# Altium PCB PCB_01.PcbDoc
Units mm, origin at the board's own origin, x right, y up, seen from the top; angles counter-clockwise.
Board outline 100 x 100 mm, 4 copper layers (Top Layer, Int1 (GND), Int2 (PWR), Bottom Layer), stack 1.369 mm thick; 74 components, 60 nets, 282 pads, 67 vias.
Unrouted connection lines stored in the file: 96.
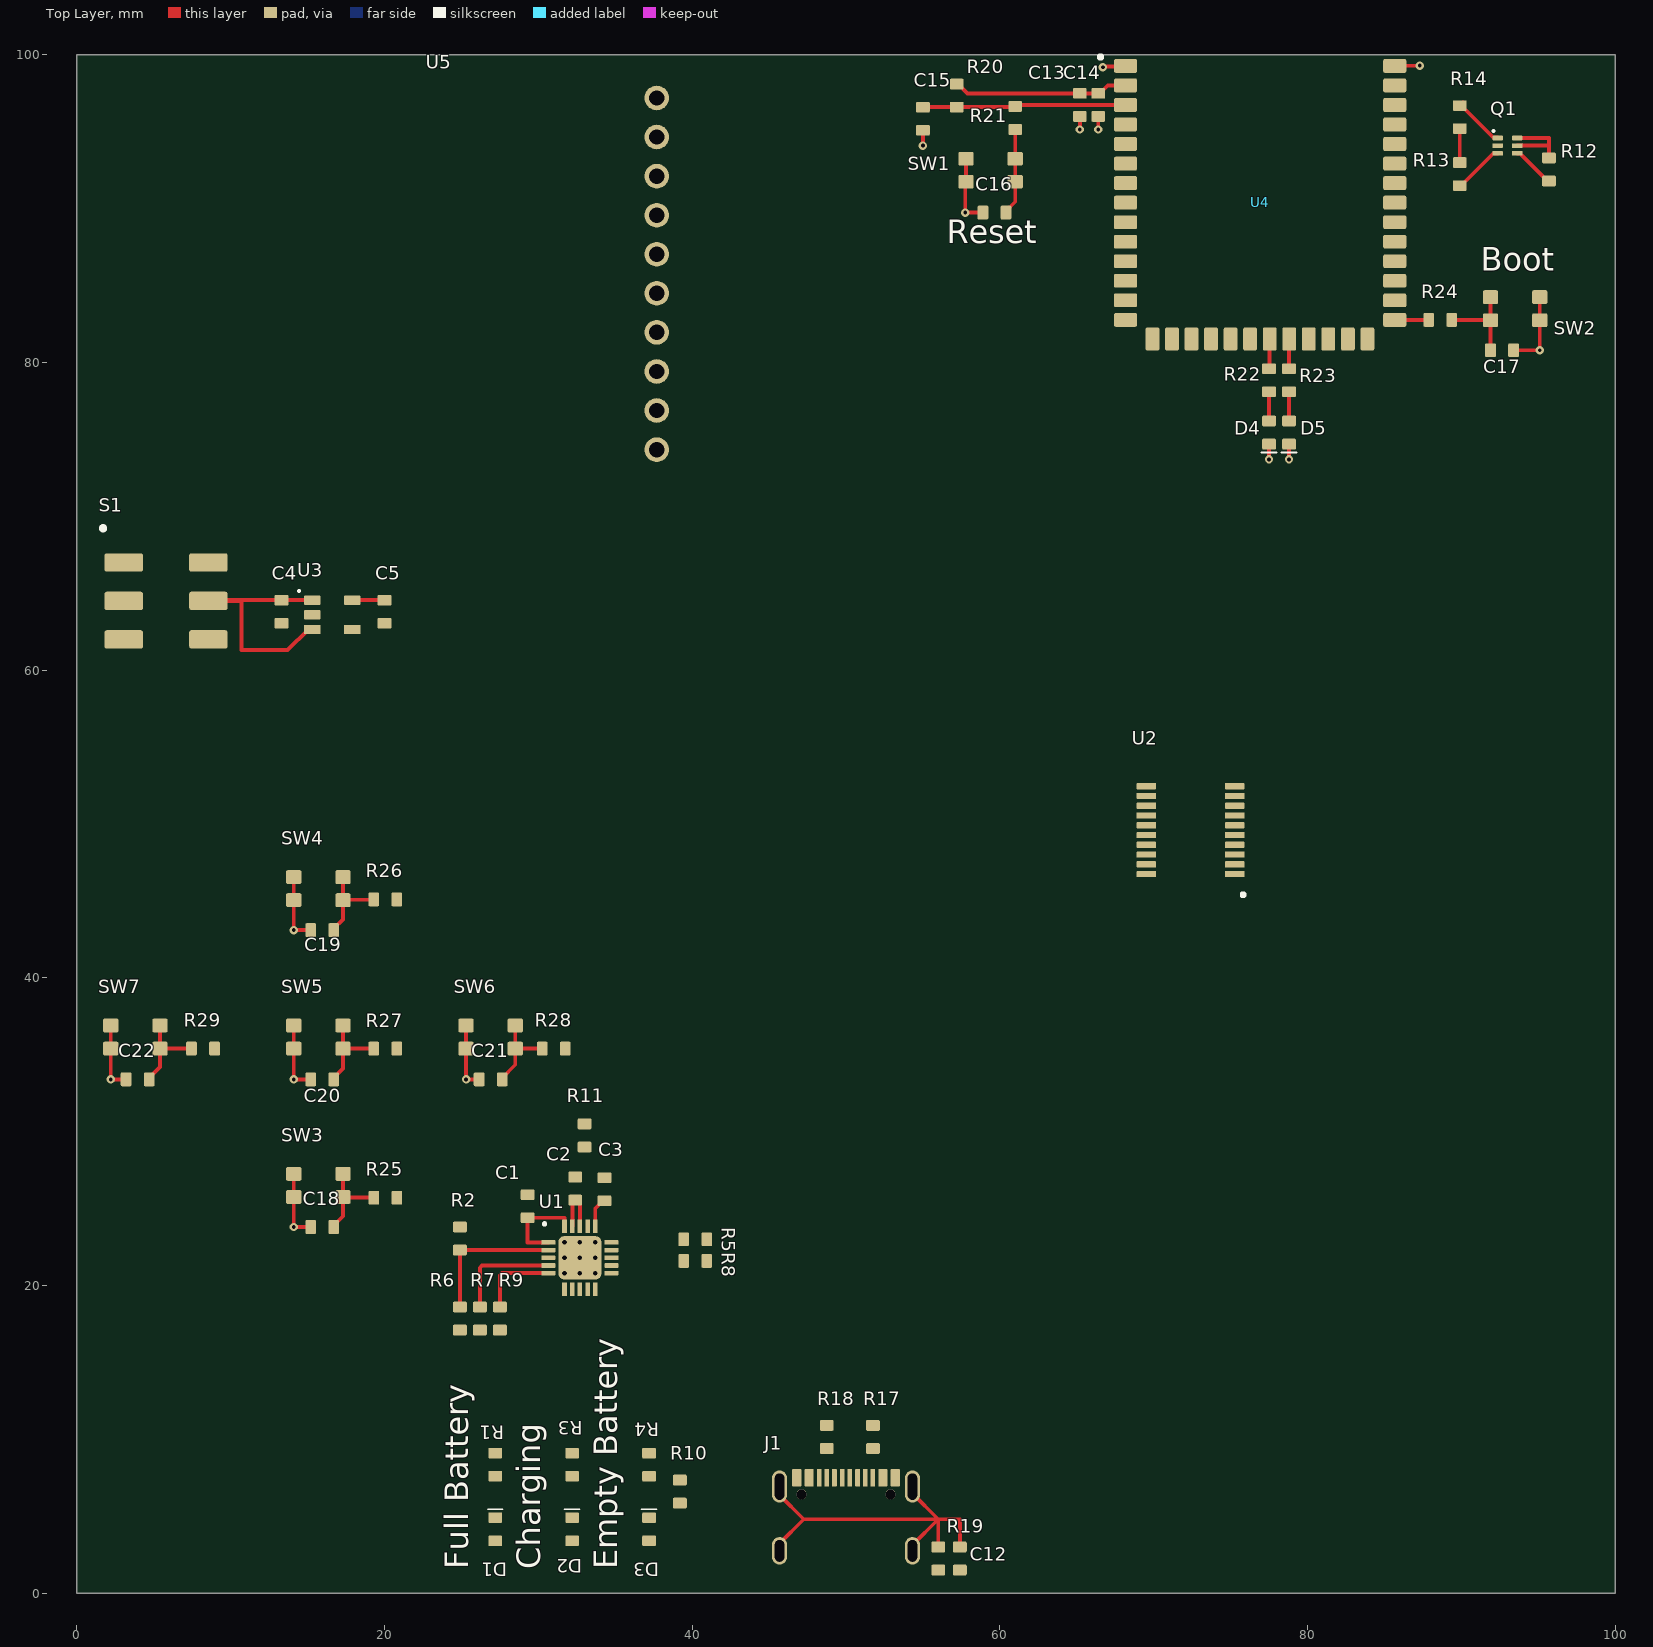
[diagram p0: Top Layer view]
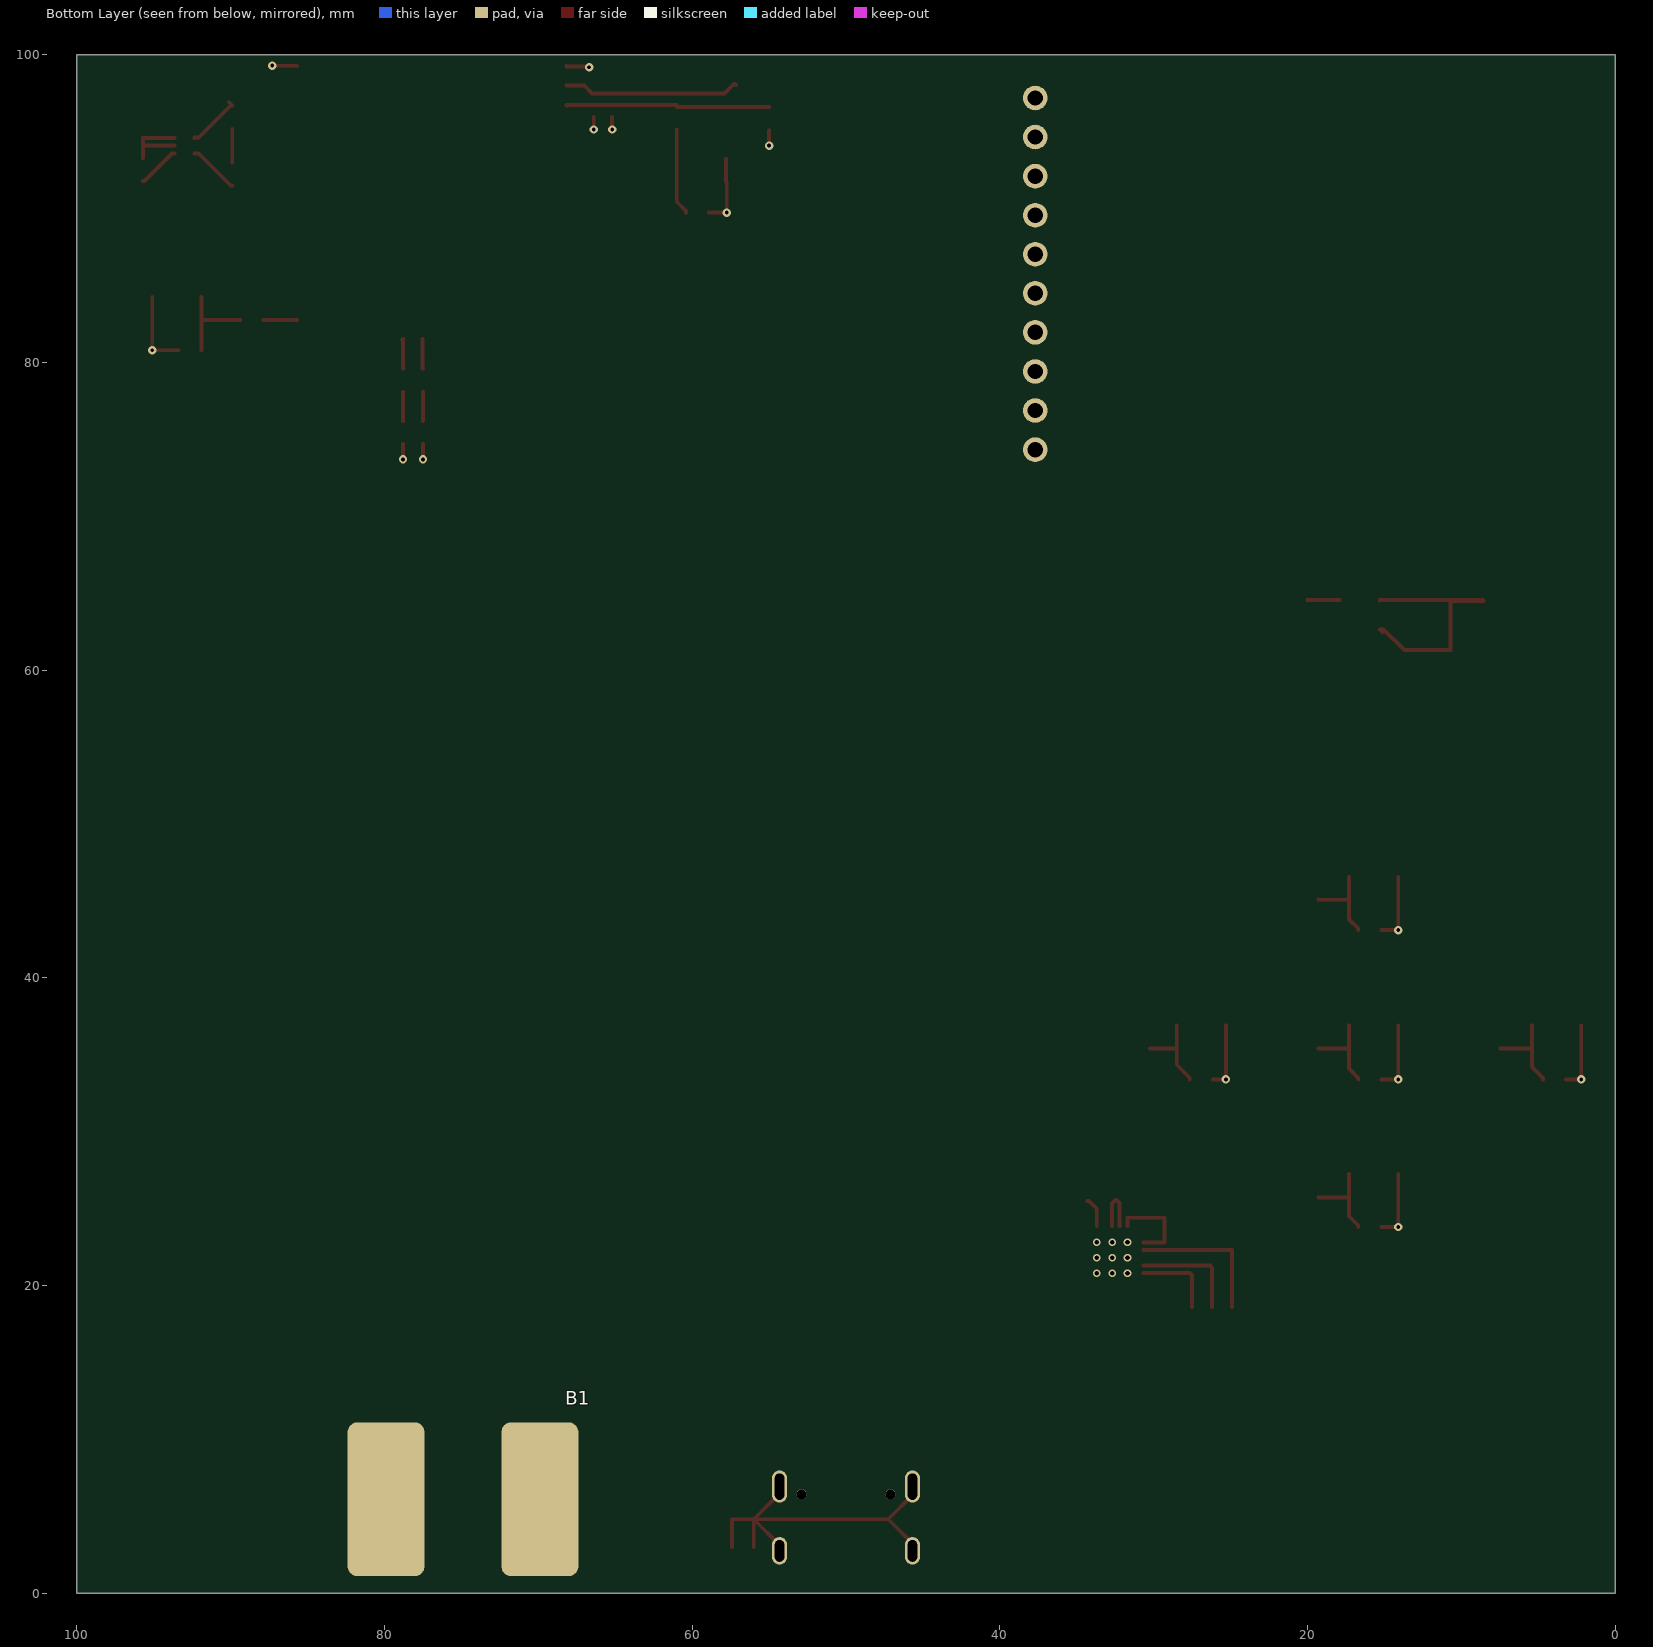
[diagram p1: Bottom Layer view, seen from below]
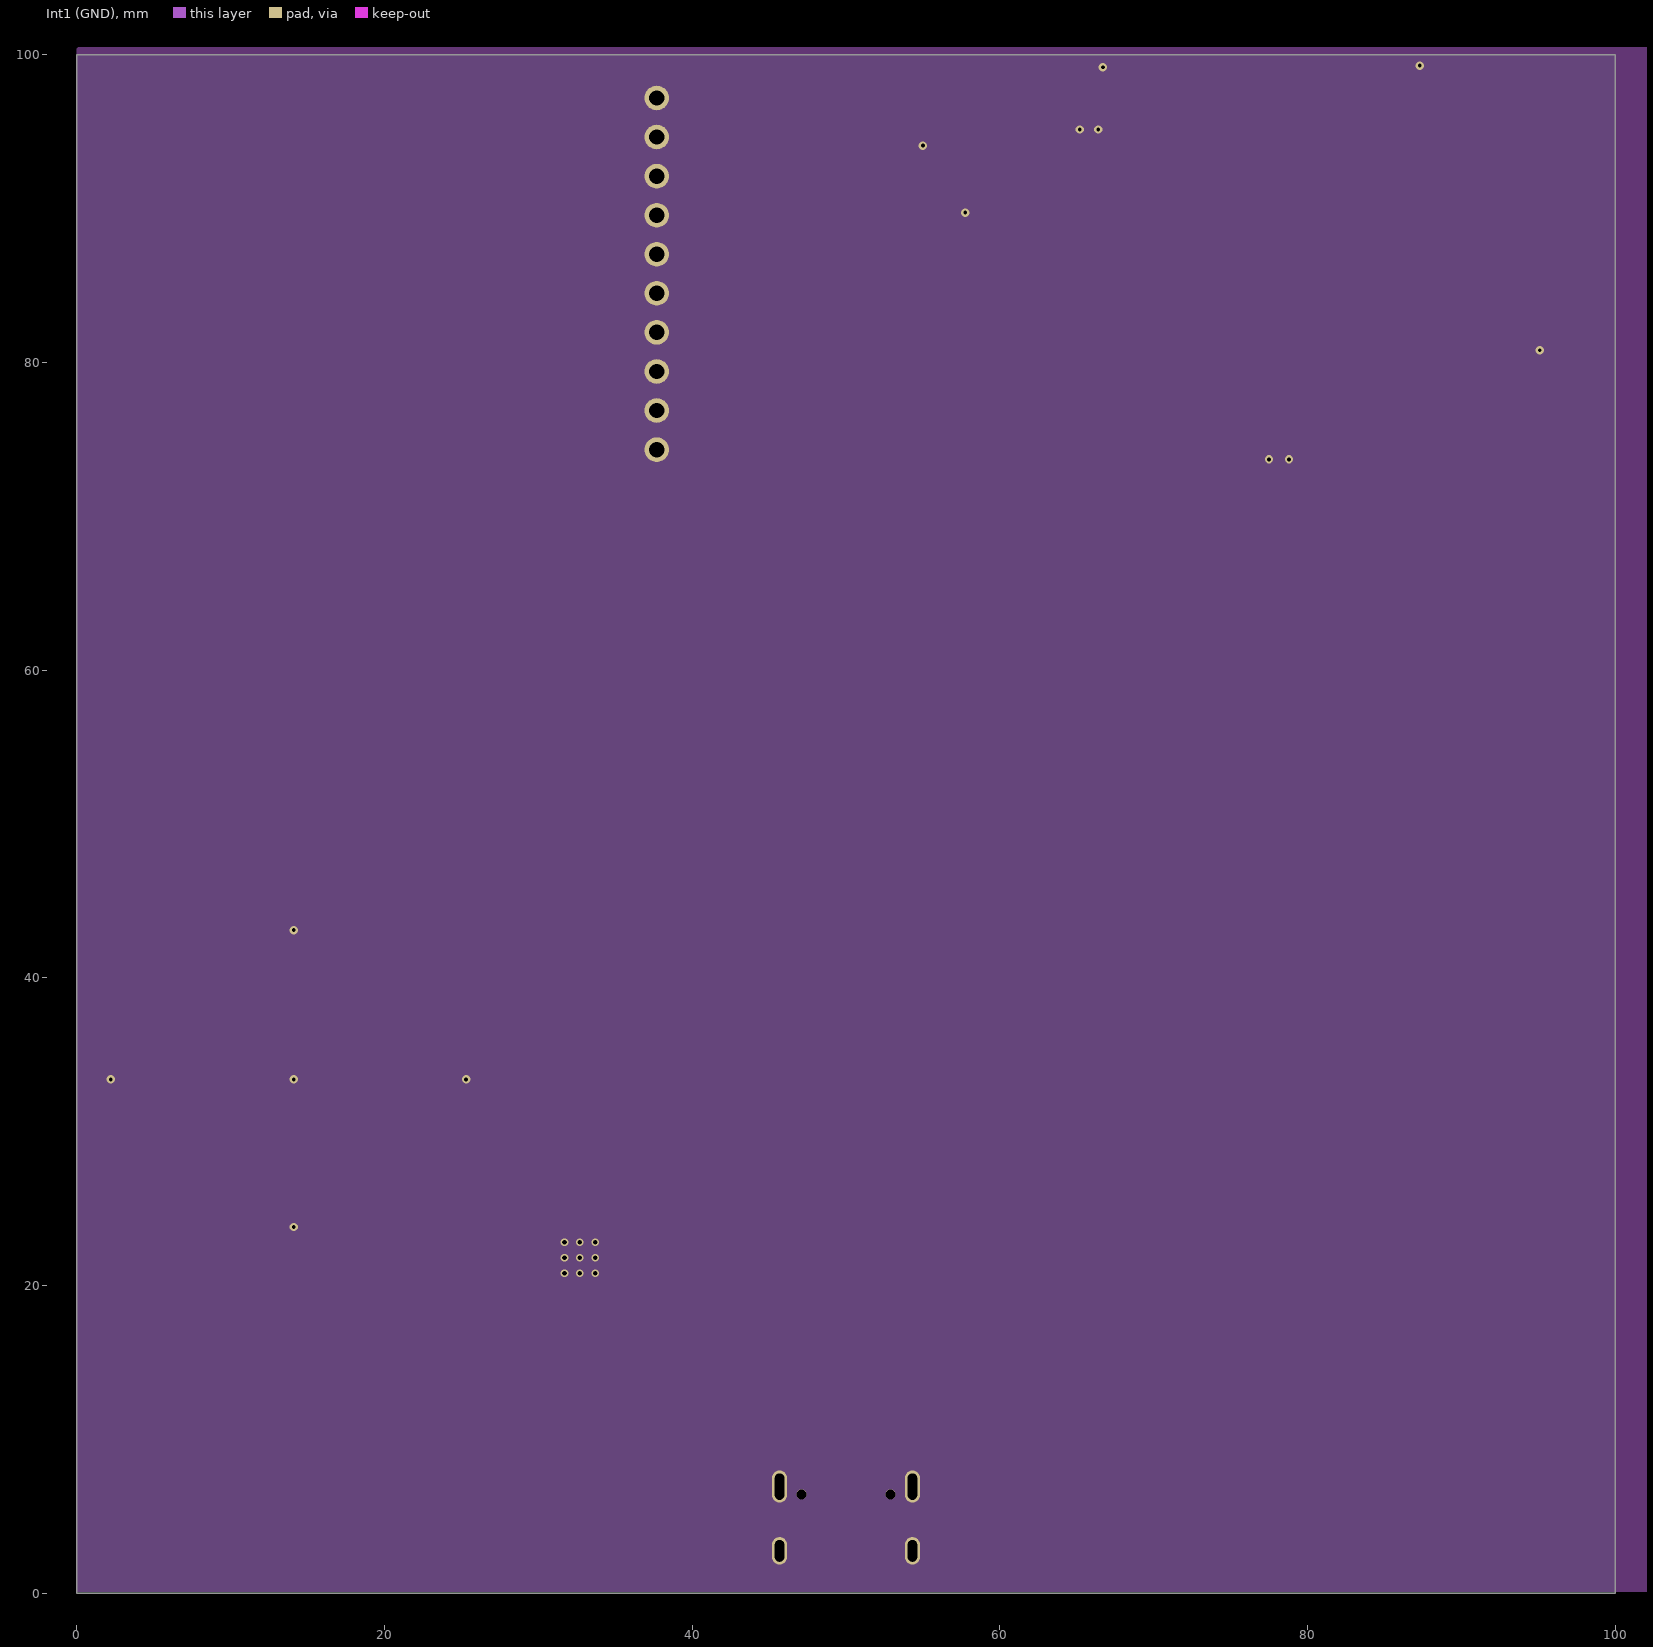
[diagram p2: Int1 (GND)]

## Layer stack, top to bottom
Top Solder: solder mask 0.0254, SM-001, Dk 4
Top Layer: signal copper 0.035
Dielectric 1: prepreg 0.1295, PP-017, Dk 4.3
Dielectric 2: prepreg 0.1295, PP-017, Dk 4.3
Int1 (GND): signal copper 0.035
Dielectric 3: core 0.7112, Core-039, Dk 4.8
Int2 (PWR): signal copper 0.035
Dielectric 4: prepreg 0.1295, PP-017, Dk 4.3
Dielectric 5: prepreg 0.1295, PP-017, Dk 4.3
Bottom Layer: signal copper 0.035
Bottom Solder: solder mask 0.0254, SM-001, Dk 4

## Board outline
0,0 0,100 100,100 100,0

## Design rules (kind name [scope] priority, off if disabled: settings)
Clearance Clearance_1 [All] p1: gap=0.2 ignorepadtopadclearanceinfootprint=TRUE
PolygonConnect [All] p1: connectstyle=Relief reliefconductorwidth=0.254 reliefentries=4 polygonreliefangle="90 Angle" airgapwidth=0.254
RoutingVias [All] p1: holewidth=0.25 width=0.55 viastyle="Through Hole" minholewidth=0.25 minwidth=0.55 maxholewidth=0.25 maxwidth=0.55
SolderMaskExpansion [All] p1: expansion=0.102 istentingtop=FALSE
Width [All] p1: maxlimit=0.3 minlimit=0.25 preferedwidth=0.25
30 further rules are at their usual default settings.

## Classes and differential pairs
component class Designator: Boot

## Components (designator, comment, footprint, x,y, rotation, side; value= is the part's Value field where it differs from the comment)
B1 "1200mAh" battery 74.9,6.1 r0 bottom
C1 "4.7 μF" "Capacitor 0603" 29.3,25.15 r270 top
C2 "10 μF" "Capacitor 0603" 32.4,26.3 r270 top
C3 "4.7 μF" "Capacitor 0603" 34.3,26.25 r90 top
C4 "4.7 μF" "Capacitor 0603" 13.3,63.8 r90 top
C5 "4.7 μF" "Capacitor 0603" 20,63.8 r270 top
C6 "0.1 μF" "Capacitor 0603" 201.381,61.155 r0 top
C7 "4.7 μF" "Capacitor 0603" 205.191,61.155 r0 top
C8 "10 nF" "Capacitor 0603" 118.45,61.155 r0 top
C9 "47 pF" "Capacitor 0603" 142.006,48.442 r0 top
C10 "47 pF" "Capacitor 0603" 145.816,48.442 r0 top
C11 "0.1 μF" "Capacitor 0603" 123.083,48.442 r0 top
C12 "4.7 μF" "Capacitor 0603" 57.4,2.25 r90 top
C13 "22 μF" "Capacitor 0603" 65.2,96.75 r90 top
C14 "0.1 μF" "Capacitor 0603" 66.4,96.75 r90 top
C15 "1 μF" "Capacitor 0603" 55,95.85 r90 top
C16 "0.1 μF" "Capacitor 0603" 59.65,89.75 r0 top
C17 "0.1 μF" "Capacitor 0603" 92.65,80.8 r0 top
C18 "0.1 μF" "Capacitor 0603" 15.95,23.8 r0 top
C19 "0.1 μF" "Capacitor 0603" 15.95,43.1 r0 top
C20 "0.1 μF" "Capacitor 0603" 15.95,33.4 r0 top
C21 "0.1 μF" "Capacitor 0603" 26.9,33.4 r0 top
C22 "0.1 μF" "Capacitor 0603" 3.95,33.4 r0 top
D1 "Green" "LED 0603" 27.2,4.15 r90 top
D2 "Blue" "LED 0603" 32.2,4.15 r90 top
D3 "Red" "LED 0603" 37.2,4.15 r90 top
D4 "Green" "LED 0603" 77.5,75.45 r270 top
D5 "Blue" "LED 0603" 78.8,75.45 r270 top
DS1 "FT231XS-R" ? 160.9,132.1 r180 top
FB2 "0.6kΩ" "Ferrite Bead 0603" 145.12,61.155 r0 top
J1 "USB4105-GF-A" USB4105-GF-A 50,7.5 r0 top
Q1 "DMC2400UV-7" "MOSFET N/P-CH" 93,94.1 r270 top
R1 "0.47kΩ" "Resistor 0603" 27.2,8.35 r90 top
R2 "330kΩ" "Resistor 0603" 24.9,23.05 r90 top
R3 "0.47kΩ" "Resistor 0603" 32.2,8.35 r90 top
R4 "0.47kΩ" "Resistor 0603" 37.2,8.35 r90 top
R5 "4.7kΩ" "Resistor 0603" 40.2,23 r0 top
R6 "110kΩ" "Resistor 0603" 24.9,17.85 r90 top
R7 "4.7kΩ" "Resistor 0603" 26.2,17.85 r90 top
R8 "100kΩ" "Resistor 0603" 40.2,21.6 r0 top
R9 "10kΩ" "Thermistor 0603" 27.5,17.85 r270 top
R10 "4.7kΩ" "Resistor 0603" 39.2,6.6 r90 top
R11 "4.7kΩ" "Resistor 0603" 33,29.75 r270 top
R12 "110kΩ" "Resistor 0603" 95.7,92.55 r90 top
R13 "30kΩ" "Resistor 0603" 89.9,92.25 r270 top
R14 "110kΩ" "Resistor 0603" 89.9,95.95 r270 top
R15 "27Ω" "Resistor 0603" 137.5,61.155 r0 top
R16 "27Ω" "Resistor 0603" 126.07,61.155 r0 top
R17 "5.1kΩ" "Resistor 0603" 51.75,10.15 r270 top
R18 "5.1kΩ" "Resistor 0603" 48.75,10.15 r270 top
R19 "100kΩ" "Resistor 0603" 56,2.25 r90 top
R20 "10kΩ" "Resistor 0603" 57.2,97.35 r270 top
R21 "0 Ω" "Resistor 0603" 61,95.9 r90 top
R22 "50 Ω" "Resistor 0603" 77.5,78.85 r270 top
R23 "50 Ω" "Resistor 0603" 78.8,78.85 r90 top
R24 "0 Ω" "Resistor 0603" 88.633,82.774 r0 top
R25 "0 Ω" "Resistor 0603" 20.05,25.7 r0 top
R26 "0 Ω" "Resistor 0603" 20.05,45.1 r0 top
R27 "0 Ω" "Resistor 0603" 20.05,35.4 r0 top
R28 "0 Ω" "Resistor 0603" 31,35.4 r0 top
R29 "0 Ω" "Resistor 0603" 8.2,35.4 r0 top
S1 "JS202011SCQN" JS202011SCQN 5.8,64.5 r270 top
SW1 "R-667843" R-667843 59.4,92.5 r0 top
SW2 "R-667843" R-667843 93.5,83.5 r0 top
SW3 "R-667843" R-667843 15.7,26.5 r0 top
SW4 "R-667843" R-667843 15.7,45.8 r0 top
SW5 "R-667843" R-667843 15.7,36.15 r0 top
SW6 "R-667843" R-667843 26.9,36.15 r0 top
SW7 "R-667843" R-667843 3.8,36.15 r0 top
U1 "MCP73871T-2CCI/ML" MCP73871 32.7,21.8 r0 top
U2 "FT231XS-R" FT231XS-R 72.4,49.6 r90 top
U3 "TLV75533PDBVR" TLV75533PDBVR 16.6,63.6 r0 top
U4 "ESP32-S3-WROOM-1-N16" ESP32-C3-WROOM-1 76.924,99.284 r0 top
U5 "‎ YUMILI1otydzvg2c" GY-9250 37.7,85.77 r180 top

## Footprints (in the part's own frame and the unit in brackets; to place one, negate y for a bottom-side part, rotate by r counter-clockwise, add the part's x,y. Pads: shape width x height; smd on the part's side, far side on the other; paste and mask are expansions set on the pad)
battery [mm]
  rrect25% 5x10 smd: +(5,0) -(-5,0)
"Capacitor 0603" [mm] "Capacitor0603"
  rrect25% 0.7x0.9 smd: A(-0.75,0) B(0.75,0)
  body extent -0.8,-0.4 0.8,0.4, height 0.9
ESP32-C3-WROOM-1 [mm] "MCU"
  rrect25% 1.5x0.9 smd: 1(-8.75,0) 2(-8.75,-1.27) 3(-8.75,-2.54) 4(-8.75,-3.81) 5(-8.75,-5.08) 6(-8.75,-6.35) 7(-8.75,-7.62) 8(-8.75,-8.89) 9(-8.75,-10.16) 10(-8.75,-11.43) 11(-8.75,-12.7) 12(-8.75,-13.97) 13(-8.75,-15.24) 14(-8.75,-16.51) 27(8.75,-16.51) 28(8.75,-15.24) 29(8.75,-13.97) 30(8.75,-12.7) 31(8.75,-11.43) 32(8.75,-10.16) 33(8.75,-8.89) 34(8.75,-7.62) 35(8.75,-6.35) 36(8.75,-5.08) 37(8.75,-3.81) 38(8.75,-2.54) 39(8.75,-1.27) 40(8.75,0)
  rrect25% 0.9x1.5 smd: 15(-7,-17.757) 16(-5.73,-17.757) 17(-4.46,-17.757) 18(-3.19,-17.757) 19(-1.92,-17.757) 20(-0.65,-17.757) 21(0.62,-17.757) 22(1.89,-17.757) 23(3.16,-17.757) 24(4.43,-17.757) 25(5.7,-17.757) 26(6.97,-17.757)
  silkscreen extent -10.49,0.46 -10.26,0.69, body extent -9,-18.01 9,7.49, height 3.25
"Ferrite Bead 0603" [mm] "Ferrite Bead 0603"
  rrect25% 0.7x0.9 smd: A(-0.75,0) B(0.75,0)
  body extent -0.8,-0.4 0.8,0.4, height 0.95
FT231XS-R [mil] "USB to UART Bridge"
  rrect25% 16x50 smd: 1(-112.5,-113) 2(-87.5,-113) 3(-62.5,-113) 4(-37.5,-113) 5(-12.5,-113) 6(12.5,-113) 7(37.5,-113) 8(62.5,-113) 9(87.5,-113) 10(112.5,-113) 11(112.5,113) 12(87.5,113) 13(62.5,113) 14(37.5,113) 15(12.5,113) 16(-12.5,113) 17(-37.5,113) 18(-62.5,113) 19(-87.5,113) 20(-112.5,113)
  silkscreen extent -169,-139 -161,-131, body extent -170,-118 170,118, height 69
GY-9250 [mm] "IMU"
  round 1.6 hole 1: 1(0,11.43) 2(0,8.89) 3(0,6.35) 4(0,3.81) 5(0,1.27) 6(0,-1.27) 7(0,-3.81) 8(0,-6.35) 9(0,-8.89) 10(0,-11.43)
  body extent -1,-12.52 15,12.53, height 0.25
JS202011SCQN [mm] "SWITCH SLIDE DPDT 300MA 6V"
  rrect25% 1.2x2.5 smd: 1(-2.5,-2.75) 2(0,-2.75) 3(2.5,-2.75) 4(-2.5,2.75) 5(0,2.75) 6(2.5,2.75)
  silkscreen extent -4.87,-4.24 -4.58,-3.96, body extent -4.5,-3.75 4.5,3.75, height 5.51
"LED 0603" [mm] "Resistor 0603"
  rrect25% 0.7x0.9 smd: A(-0.75,0) B(0.75,0)
  silkscreen extent 1.3,-0.5 1.3,0.5, body extent -0.8,-0.4 0.8,0.4, height 0.35
MCP73871 [mm]
  rrect25% 0.9x0.3 smd: 1(-2.05,1) 2(-2.05,0.5) 3(-2.05,0) 4(-2.05,-0.5) 5(-2.05,-1) 11(2.05,-1) 12(2.05,-0.5) 13(2.05,0) 14(2.05,0.5) 15(2.05,1)
  rrect25% 0.3x0.9 smd: 6(-1,-2.05) 7(-0.5,-2.05) 8(0,-2.05) 9(0.5,-2.05) 10(1,-2.05) 16(1,2.05) 17(0.5,2.05) 18(0,2.05) 19(-0.5,2.05) 20(-1,2.05)
  rrect25% 2.8x2.8 smd: 21(0,0)
  silkscreen extent -2.35,2.15 -2.25,2.25, body extent -2,-2 2,2, height 1
"MOSFET N/P-CH" [mm] "MOSFET N/P-CH"
  rrect25% 0.3x0.67 smd: 1(-0.5,-0.635) 2(0,-0.635) 3(0.5,-0.635) 4(-0.5,0.635) 5(0,0.635) 6(0.5,0.635)
  silkscreen extent -0.95,-0.9 -0.95,-0.9, body extent -0.8,-0.8 0.8,0.8, height 0.6
R-667843 [mm] "SWITCH TACTILE SPST-NO 0.05A 12V"
  rrect25% 1x0.9 smd: A(-1.6,-0.75) A(-1.6,0.75) B(1.6,-0.75) B(1.6,0.75)
"Resistor 0603" [mm] "Resistor 0603"
  rrect25% 0.7x0.9 smd: A(-0.75,0) B(0.75,0)
  body extent -0.8,-0.4 0.8,0.4, height 0.55
"Thermistor 0603" [mm] "Thermistor 0603"
  rrect25% 0.7x0.9 smd: A(-0.75,0) B(0.75,0)
  body extent -0.8,-0.4 0.8,0.4, height 0.9
TLV75533PDBVR [mm] "IC REG LINEAR 3.3V 500MA SOT23-5"
  rrect25% 1.1x0.6 smd: 1(-1.3,0.95) 2(-1.3,0) 3(-1.3,-0.95) 4(1.3,-0.95) 5(1.3,0.95)
  silkscreen extent -2.15,1.55 -2.15,1.55, body extent -1.4,-1.45 1.4,1.45, height 1.45
USB4105-GF-A [mm] "CONN RCPT TYPE C 6P SMD RA"
  round 0.65 hole 0.65 unplated: 36(-2.89,-1.075) 36(2.89,-1.075)
  rrect25% 0.6x1.15 smd: A1(-3.2,0) A4(-2.4,0) B1(3.2,0) B4(2.4,0)
  rrect25% 0.3x1.15 smd: A5(-1.25,0) A6(-0.25,0) A7(0.25,0) A8(1.25,0) B5(1.75,0) B6(0.75,0) B7(-0.75,0) B8(-1.75,0)
  oval 1x1.8 hole 0.6 slot 1.4 at 90 deg: SHELL(-4.32,-4.755) SHELL(4.32,-4.755)
  oval 1x2.1 hole 0.6 slot 1.7 at 90 deg: SHELL(-4.32,-0.575) SHELL(4.32,-0.575)
  body extent -4.47,-7.35 4.47,0.36, height 3.31
? [mm]
  round 1.6 hole 1: 1(-32.75,8.89) 2(-32.75,6.35) 3(-32.75,3.81) 4(-32.75,1.27) 5(-32.75,-1.27) 6(-32.75,-3.81) 7(-32.75,-6.35) 8(-32.75,-8.89)
  round 4 hole 3: 7(-32.75,-19.15) 7(-32.75,19.15) 7(32.75,-19) 7(32.75,19.15)
  Top Layer lines w0.1: 35.25,21.65 35.25,-21.65 -35.25,-21.65 -35.25,21.65 35.25,21.65
  body extent -35.25,-21.65 35.25,21.65, height 1

## Part data
B1: library part Battery, "Lipobatteri - 103040 - 1.200 mAh", Manufacturer=batterikungen, Manufacturer Part Number=103040, Supplier Part Number 1=827-016, Supplier 1=Batterikungen
C1 C3 C4 C5 C12: library part "4,7 μF 0603", "Capacitor 4.7 μF", Manufacturer="Samsung Electro-Mechanics", Manufacturer Part Number=CL10A475KP8NNNC, Supplier Part Number 1=1276-1044-1-ND, Supplier 1=Digikey
C2: library part "10 μF 0603", "Capacitor 10 μF", Manufacturer="Samsung Electro-Mechanics", Manufacturer Part Number=CL10A106MQ8NNNC, Supplier Part Number 1=1276-1119-1-ND, Supplier 1=Digikey
C6 C11 C14 C16 C17 C20: library part "0.1 μF 0603", "Capacitor 0.1 μF", Manufacturer="Samsung Electro-Mechanics", Manufacturer Part Number=CL10B104KB8NNWC, Supplier Part Number 1=1276-1935-1-ND, Supplier 1=Digikey
C7: library part "0.1 μF 0603", "Capacitor 0.1 μF", Manufacturer="Samsung Electro-Mechanics", Manufacturer Part Number=CL10A475KP8NNNC, Supplier Part Number 1=1276-1044-1-ND, Supplier 1=Digikey
C8: library part "0.1 μF 0603", "Capacitor 0.1 μF", Manufacturer="Samsung Electro-Mechanics", Manufacturer Part Number=CL10B103KB8NNNC, Supplier Part Number 1=1276-1009-1-ND, Supplier 1=Digikey
C9 C10: library part "0.1 μF 0603", "Capacitor 0.1 μF", Manufacturer="Walsin Technology Corporation", Manufacturer Part Number=0603N470J500CT, Supplier Part Number 1=1292-1528-1-ND, Supplier 1=Digikey
C13: library part "22 μF 0603", "Capacitor 22 μF", Manufacturer="Murata Electronics", Manufacturer Part Number=GRM188R60G226MEA0D, Supplier Part Number 1=490-5526-1-ND, Supplier 1=Digikey
C15: library part "1 μF 0603", "Capacitor 1 μF", Manufacturer="Samsung Electro-Mechanics", Manufacturer Part Number=CL10A105KA8NNNC, Supplier Part Number 1=1276-1102-1-ND, Supplier 1=Digikey
C18 C19: library part "47 pF 0603", "Capacitor 47 pF", Manufacturer="Samsung Electro-Mechanics", Manufacturer Part Number=CL10B104KB8NNWC, Supplier Part Number 1=1276-1935-1-ND, Supplier 1=Digikey
C21: library part "10 nF 0603", "Capacitor 10 nF", Manufacturer="Samsung Electro-Mechanics", Manufacturer Part Number=CL10B104KB8NNWC, Supplier Part Number 1=1276-1935-1-ND, Supplier 1=Digikey
C22: library part "4,7 μF 0603", "Capacitor 4.7 μF", Manufacturer="Samsung Electro-Mechanics", Manufacturer Part Number=CL10B104KB8NNWC, Supplier Part Number 1=1276-1935-1-ND, Supplier 1=Digikey
D1 D4: library part D.Green, "Diode Green", Manufacturer="Lumex Opto/Components Inc.", Manufacturer Part Number=SML-LXFT0603GC-TR, Supplier Part Number 1=67-SML-LXFT0603GC-TRCT-ND, Supplier 1=Digikey
D2 D5: library part D.Blue, "Diode Blue", Manufacturer="Lite-On Inc.", Manufacturer Part Number=LTST-C193TBKT-5A, Supplier Part Number 1=160-1827-1-ND, Supplier 1=Digikey
D3: library part D.Red, "Diode Red", Manufacturer="Lite-On Inc.", Manufacturer Part Number=LTST-C190KRKT, Supplier Part Number 1=160-1436-1-ND, Supplier 1=Digikey
DS1: library part LCD-screen, "240×320, General 2.4inch LCD Display Module, 65K RGB", Manufacturer="FTDI, Future Technology Devices International Ltd", Supplier Part Number 1=768-1129-1-ND, Manufacturer Part Number=FT231XS-R, Supplier 1=Waveshare
FB2: library part "FB 0.6 kΩ 0603", "Ferrite Bead 600 Ω", Manufacturer="Murata Electronics", Manufacturer Part Number=BLM18AG601SN1D, Supplier Part Number 1=490-1014-1-ND, Supplier 1=Digikey
J1: "CONN RCPT TYPE C 6P SMD RA", Manufacturer=GCT, Supplier Part Number 1=2073-USB4105-GF-ACT-ND, Manufacturer Part Number=USB4105-GF-A, Supplier 1=Digikey
Q1: "MOSFET N/P-CH 20V SOT563", Manufacturer="Diodes Incorporated", Supplier Part Number 1=DMC2400UV-7DICT-ND, Manufacturer Part Number=DMC2400UV-7, Supplier 1=Digikey
R1 R3 R4: library part "0.47 kΩ 0603", "Resistor 470 Ω", Manufacturer="Stackpole Electronics Inc", Manufacturer Part Number=RMCF0603FT470R, Supplier Part Number 1=RMCF0603FT470RCT-ND, Supplier 1=Digikey
R2: library part "330 kΩ 0603", "Resistor 330000 Ω", Manufacturer=YAGEO, Manufacturer Part Number=RC0603JR-07330KL, Supplier Part Number 1=311-330KGRCT-ND, Supplier 1=Digikey
R5 R7 R10 R11: library part "4.7 kΩ 0603", "Resistor 4700 Ω", Manufacturer="Stackpole Electronics Inc", Manufacturer Part Number=RMCF0603FT4K70, Supplier Part Number 1=RMCF0603FT4K70CT-ND, Supplier 1=Digikey
R6 R12 R14: library part "110 kΩ 0603", "Resistor 110000 Ω", Manufacturer="Stackpole Electronics Inc", Manufacturer Part Number=RMCF0603FT110K, Supplier Part Number 1=RMCF0603FT110KCT-ND, Supplier 1=Digikey
R8: library part "100 kΩ 0603", "Resistor 100000 Ω", Manufacturer="Stackpole Electronics Inc", Manufacturer Part Number=RMCF0603FT100K, Supplier Part Number 1=RMCF0603FT100KCT-ND, Supplier 1=Digikey
R9: library part "NTC 10 KΩ 0603", "Thermistor 10000 Ω", Manufacturer="Panasonic Electronic Components", Manufacturer Part Number=ERT-J1VR103J, Supplier Part Number 1=P10547CT-ND, Supplier 1=Digikey
R13: library part "30 kΩ 0603", "Resistor 30000 Ω", Manufacturer=YAGEO, Manufacturer Part Number=RC0603FR-0730KL, Supplier Part Number 1=311-30.0KHRCT-ND, Supplier 1=Digikey
R15 R16: library part "0 Ω 0603", "Resistor 0 Ω", Manufacturer="Stackpole Electronics Inc", Manufacturer Part Number=RMCF0603FT27R0, Supplier Part Number 1=RMCF0603FT27R0CT-ND, Supplier 1=Digikey
R17 R18: library part "0 Ω 0603", "Resistor 0 Ω", Manufacturer="Stackpole Electronics IncStackpole Electronics Inc", Manufacturer Part Number=RMCF0603FT5K10, Supplier Part Number 1=RMCF0603FT5K10CT-ND, Supplier 1=Digikey
R19: library part "0 Ω 0603", "Resistor 0 Ω", Manufacturer="Stackpole Electronics Inc", Manufacturer Part Number=RMCF0603FT100K, Supplier Part Number 1=RMCF0603FT100KCT-ND, Supplier 1=Digikey
R20: library part "10 kΩ 0603", "Resistor 10000 Ω", Manufacturer="Stackpole Electronics Inc", Manufacturer Part Number=RMCF0603FT10K0, Supplier Part Number 1=RMCF0603FT10K0CT-ND, Supplier 1=Digikey
R21 R24: library part "0 Ω 0603", "Resistor 0 Ω", Manufacturer="Stackpole Electronics Inc", Manufacturer Part Number=RMCF0603ZT0R00, Supplier Part Number 1=RMCF0603ZT0R00CT-ND, Supplier 1=Digikey
R22 R23: library part "0.05 kΩ 0603", "Resistor 50 Ω", Manufacturer="Vishay Dale", Manufacturer Part Number=CRCW060350R0FKEA, Supplier Part Number 1=541-3318-1-ND, Supplier 1=Digikey
R25 R26: library part "27 Ω 0603", "Resistor 27 Ω", Manufacturer="Stackpole Electronics Inc", Manufacturer Part Number=RMCF0603ZT0R00, Supplier Part Number 1=RMCF0603ZT0R00CT-ND, Supplier 1=Digikey
R27 R28: library part "5.1 kΩ 0603", "Resistor 5100 Ω", Manufacturer="Stackpole Electronics Inc", Manufacturer Part Number=RMCF0603ZT0R00, Supplier Part Number 1=RMCF0603ZT0R00CT-ND, Supplier 1=Digikey
R29: library part "100 kΩ 0603", "Resistor 100000 Ω", Manufacturer="Stackpole Electronics Inc", Manufacturer Part Number=RMCF0603ZT0R00, Supplier Part Number 1=RMCF0603ZT0R00CT-ND, Supplier 1=Digikey
S1: "SWITCH SLIDE DPDT 300MA 6V", Manufacturer=C&K, Supplier Part Number 1=401-2002-1-ND, Manufacturer Part Number=JS202011SCQN, Supplier 1=Digikey
SW1 SW2 SW4 SW5 SW6 SW7: "SWITCH TACTILE SPST-NO 0.05A 12V", Manufacturer="Mitsumi Electric Company Ltd", Supplier Part Number 1=2508-R-667843CT-ND, Manufacturer Part Number=R-667843, Supplier 1=Digikey
SW3: library part JS202011SCQN, "SWITCH SLIDE DPDT 300MA 6V", Manufacturer="Mitsumi Electric Company Ltd", Supplier Part Number 1=2508-R-667843CT-ND, Manufacturer Part Number=R-667843, Supplier 1=Digikey
U1: library part MCP73871, "IC BATT CHG LI-ION 1CELL 20QFN", Manufacturer="Microchip Technology", Supplier Part Number 1=MCP73871T-2CCI/MLDKR-ND, Manufacturer Part Number=MCP73871T-2CCI/ML, Supplier 1=Digikey
U2: library part ESP32-S3-WROOM-1-N16, "RF TXRX MODULE BT PCB TRACE SMD", Manufacturer="FTDI, Future Technology Devices International Ltd", Supplier Part Number 1=768-1129-1-ND, Manufacturer Part Number=FT231XS-R, Supplier 1=Digikey
U3: "IC REG LINEAR 3.3V 500MA SOT23-5", Manufacturer="Texas Instruments", Supplier Part Number 1=296-50411-1-ND, Manufacturer Part Number=TLV75533PDBVR, Supplier 1=Digikey
U4: library part GY-9250, "YUMILI Gyroskopmodul MPU-9250 GY-9250 9-axel 16-bitars", Manufacturer="Espressif Systems", Supplier Part Number 1=1965-ESP32-S3-WROOM-1-N16CT-ND, Manufacturer Part Number=ESP32-S3-WROOM-1-N16, Supplier 1=Digikey
U5: library part FT231XS-R_1, "IC USB SERIAL FULL UART 20SSOP", Manufacturer=YUMILI, Supplier Part Number 1=B09XZQNQBV, Manufacturer Part Number="‎ YUMILI1otydzvg2c", Supplier 1=Amazon

## Via types
v1: diameter 0.4, hole 0.3, Top Layer to Bottom Layer, 44 vias
v2: diameter 0.55, hole 0.25, Top Layer to Bottom Layer, 14 vias
v3: diameter 0.5, hole 0.3, Top Layer to Bottom Layer, 9 vias

## Nets (pads, with @x,y where several pads share a name; then routed paths per layer and width w, separated by ;. In a path a pad name is that pad's centre, name@x,y a point inside that pad or via, vN(x,y) a via of type N, cw(c..) or ccw(c..) an arc to the next point about the centre after c; other vN are vias at no path point)
+3V3: C5.A C13.B C14.B DS1.1 R20.A U3.5 U4.2 U5.1 | length 13.6
  Top Layer w0.254: U3.5 C5.A ; R20.A@57.143,98.043 R20.A 57.3,98.1 57.9,97.5 C13.B C14.B 66.5,97.5 67.014,98.014 U4.2
"Down button": R25.B U4.6
GND: B1.- C1.A C2.A C3.B C4.A C5.B C6.A C7.A C8.A C9.A C10.A C11.A C12.A C13.A C14.A C15.A C16.A C17.B C18.A C19.A C20.A C21.A C22.A D4.B D5.B DS1.2 J1.A1 J1.B1 Q1.1 R5.B R6.A R8.B R9.B R14.A R17.A R18.A R19.A SW1.A SW2.B SW3.A SW4.A SW5.A SW6.A SW7.A U1.3 U1.10 U1.11 U1.21 U2.6 U2.16 U3.2 U4.1 U4.40 U5.2 | length 43.9
  Top Layer w0.254: SW7.A@2.2,36.9 2.2,35.4 v2(2.2,33.4) C22.A ; SW3.A@14.1,27.25 14.1,25.75 v2(14.1,23.8) C18.A ; SW5.A@14.1,36.9 14.1,35.4 v2(14.1,33.4) C20.A ; SW4.A@14.1,46.55 14.1,45.05 v2(14.1,43.1) C19.A ; SW6.A@25.3,36.9 25.3,35.4 v2(25.3,33.4) C21.A ; v2(55,94.1) C15.A ; SW1.A@57.8,93.25 57.8,91.75 57.75,91.7 v2(57.75,89.75) C16.A ; v2(65.2,95.15) C13.A@65.2,95.95 ; v2(66.4,95.15) C14.A@66.4,95.95 ; v2(66.7,99.2) 66.742,99.242 68.132,99.242 U4.1 ; v2@77.5,73.6 v2(77.5,73.7) D4.B ; v2(78.8,73.7) D5.B ; U4.40 85.682,99.292 87.292,99.292 v2(87.3,99.3) ; R14.A@90.123,96.923 R14.A 90,96.7 92.077,94.623 92.342,94.623 Q1.1 ; C17.B v2(95.1,80.8) 95.1,82.75 SW2.B@95.1,84.25
  other v3: 31.7,20.8 32.7,20.8 33.7,20.8 31.7,21.8 32.7,21.8 33.7,21.8 31.7,22.8 32.7,22.8 33.7,22.8
"Left button": R29.B U4.8
"Middle button": R27.B U4.7
NetC4_B: C4.B S1.5 U3.1 U3.3 | length 17.6
  Top Layer w0.254: U3.3@15.127,62.477 U3.3 15.05,62.65 13.7,61.3 10.7,61.3 10.7,64.5 S1.5 8.6,64.55 10.7,64.55 C4.B U3.1 U3.1@15.275,64.525
NetC9_B: C9.B J1.A7 J1.B7 R15.A
NetC10_B: C10.B J1.A6 J1.B6 R16.A
NetC11_B: C11.B U2.3 U2.13 U2.14
NetC12_B: C12.B J1.SHELL R19.B | length 24.8
  Top Layer w0.254: J1.SHELL@45.68,2.745 45.68,3.225 47.255,4.8 ; J1.SHELL@45.68,6.925 45.68,6.375 47.255,4.8 ; J1.SHELL@54.32,2.745 54.32,3.12 56,4.8 ; J1.SHELL@54.32,6.925 54.32,6.48 56,4.8 ; R19.B 56,4.8 ; C12.B 57.4,4.8 56,4.8 ; 47.255,4.8 56,4.8
NetC15_B: C15.B R20.B R21.B U4.3 | length 13.4
  Top Layer w0.254: C15.B R20.B 57.225,96.625 60.975,96.625 R21.B 61,96.738 61.006,96.744 U4.3 U4.3@68.127,96.697
NetC16_B: C16.B R21.A SW1.B | length 5.6
  Top Layer w0.254: C16.B 60.4,89.85 61,90.45 61,91.75 61,93.25 R21.A
NetC17_A: C17.A R24.B SW2.A | length 6
  Top Layer w0.254: R24.B 89.395,82.762 91.888,82.762 SW2.A@91.9,82.75 ; C17.A SW2.A@91.9,82.75 ; SW2.A@91.9,84.25 SW2.A@91.9,82.75
NetC18_B: C18.B R25.A SW3.B | length 5.7
  Top Layer w0.254: C18.B 16.7,23.9 17.3,24.5 SW3.B@17.3,25.75 ; SW3.B@17.3,27.25 SW3.B@17.3,25.75 ; R25.A 19.275,25.725 17.325,25.725 SW3.B@17.3,25.75
NetC19_B: C19.B R26.A SW4.B | length 5.7
  Top Layer w0.254: C19.B 16.7,43.2 17.3,43.8 SW4.B@17.3,45.05 ; SW4.B@17.3,46.55 SW4.B@17.3,45.05 ; R26.A 19.275,45.075 17.325,45.075 SW4.B@17.3,45.05
NetC20_B: C20.B R27.A SW5.B | length 5.7
  Top Layer w0.254: C20.B 16.7,33.5 17.3,34.1 SW5.B@17.3,35.4 ; SW5.B@17.3,36.9 SW5.B@17.3,35.4 ; R27.A SW5.B@17.3,35.4
NetC21_B: C21.B R28.A SW6.B | length 5.6
  Top Layer w0.254: C21.B 27.65,33.5 28.5,34.35 SW6.B@28.5,35.4 ; SW6.B@28.5,36.9 SW6.B@28.5,35.4 ; R28.A SW6.B@28.5,35.4
NetC22_B: C22.B R29.A SW7.B | length 5.8
  Top Layer w0.254: C22.B 4.7,33.5 5.4,34.2 SW7.B@5.4,35.4 ; SW7.B@5.4,36.9 SW7.B@5.4,35.4 ; R29.A SW7.B@5.4,35.4
NetD1_B: D1.B R1.A
NetD2_B: D2.B R3.A
NetD3_B: D3.B R4.A
NetD4_A: D4.A R22.B | length 1.9
  Top Layer w0.254: D4.A R22.B
NetD5_A: D5.A R23.A | length 1.9
  Top Layer w0.254: D5.A R23.A
NetDS1_3: DS1.3 U4.19
NetDS1_4: DS1.4 U4.20
NetDS1_5: DS1.5 U4.18
NetDS1_6: DS1.6 U4.24
NetDS1_7: DS1.7 U4.25
  other v1: 127.956,111.237 193.995,111.261 192.936,111.381 129,111.45 126.986,111.678 194.922,111.786 192.15,112.1 192.15,112.1 129.719,112.236 126.461,112.605 195.363,112.756 191.937,113.144 129.839,113.295 126.581,113.664 195.15,113.8 192.378,114.114 129.314,114.222 127.3,114.45 127.3,114.45 194.364,114.519 193.305,114.639 128.344,114.663 127.956,149.387 193.995,149.561 129,149.6 192.936,149.681 126.986,149.828 194.922,150.086 129.719,150.386 192.15,150.4 126.461,150.755 195.363,151.056 129.839,151.445 191.937,151.444 126.581,151.814 195.15,152.1 195.15,152.1 129.314,152.372 192.378,152.414 127.3,152.6 127.3,152.6 128.344,152.813 194.364,152.819 193.305,152.939
NetDS1_8: DS1.8 U4.23
NetJ1_A5: J1.A5 R18.B
NetJ1_B5: J1.B5 R17.B
NetQ1_2: Q1.2 U4.39
NetQ1_3: Q1.3 R13.B | length 3.3
  Top Layer w0.254: R13.B 90,91.5 92.077,93.577 92.342,93.577 Q1.3
NetQ1_4: Q1.4 Q1.5 R12.B | length 5.4
  Top Layer w0.254: Q1.5 95.7,94.1 ; Q1.4 95.7,94.6 95.7,94.1 ; R12.B 95.7,94.1
NetR1_B: R1.B U1.6
NetR2_A: R2.A R6.B U1.2 | length 9.4
  Top Layer w0.254: R6.B R2.A U1.2
NetR3_B: R3.B U1.7
NetR4_B: R4.B U1.8
NetR5_A: R5.A U1.13
NetR7_B: R7.B U1.4 | length 7.1
  Top Layer w0.254: R7.B 26.2,21.151 26.349,21.3 U1.4
NetR8_A: R8.A U1.12
NetR9_A: R9.A U1.5 | length 5.3
  Top Layer w0.254: R9.A 27.5,20.651 27.649,20.8 U1.5
NetR10_B: R10.B U1.9
NetR11_B: R11.B U1.17
NetR13_A: R13.A R14.B U4.38 | length 2.2
  Top Layer w0.254: R13.A R14.B
NetR15_B: R15.B U2.12
NetR16_B: R16.B U2.11
NetR22_A: R22.A U4.21 | length 1.9
  Top Layer w0.254: R22.A 77.522,79.622 77.522,81.505 U4.21
NetR23_B: R23.B U4.22 | length 2
  Top Layer w0.254: R23.B 78.757,79.643 78.807,79.693 78.807,81.52 U4.22 U4.22@78.857,81.484
NetR24_A: R24.A U4.27 | length 2.2
  Top Layer w0.254: U4.27 R24.A
NetU2_4: U2.4 U4.37
NetU2_20: U2.20 U4.36
NetU4_11: U4.11 U5.4
NetU4_12: U4.12 U5.3
"Right button": R28.B U4.9
"Up button": R26.B U4.5
V_Bat: B1.+ C3.A Q1.6 R12.A U1.14 U1.15 U1.16 | length 4.8
  Top Layer w0.254: U1.16 33.7,25 34.2,25.5 C3.A ; Q1.6 93.82,93.6 93.843,93.577 93.843,93.557 95.6,91.8 R12.A
V_Bus: C8.B FB2.A J1.A4 J1.B4
V_Charger: C1.B S1.4 U1.1 U1.20 | length 5.9
  Top Layer w0.254: U1.1 29.3,22.8 C1.B 31.7,24.4 U1.20
VCC: C2.B C6.B C7.B D1.A D2.A D3.A FB2.B R2.B R7.A R10.A R11.A U1.18 U1.19 U2.15 | length 3.7
  Top Layer w0.254: U1.19 32.223,23.873 32.223,25.373 C2.B 32.477,25.55 32.7,25.327 U1.18
pads on no net: J1.36 J1.A8 J1.B8 S1.1 S1.2 S1.3 S1.6 U2.1 U2.2 U2.5 U2.7 U2.8 U2.9 U2.10 U2.17 U2.18 U2.19 U3.4 U4.4 U4.10 U4.13 U4.14 U4.15 U4.16 U4.17 U4.26 U4.28 U4.29 U4.30 U4.31 U4.32 U4.33 U4.34 U4.35 U5.5 U5.6 U5.7 U5.8 U5.9 U5.10

## Polygon pours and split planes (outlines as drawn)
GND on Int1 (GND) "GND_L02" (solid, pour order 0): 0,0.1 151.1,0.1 151.5,0.5 151.5,100.5 0.1,100.5 0,100.4 0.1,100.5 0,100.4

## Silkscreen, mask and mechanical layers (free items; w line width, h text height)
Top Overlay:
  text "Reset" at 56.554,87.754 h1.52
  text "Boot" at 91.254,85.954 h1.52
  text "Full Battery" at 25.438,1.554 h1.52 r90
  text "Charging" at 30.138,1.554 h1.52 r90
  text "Empty Battery" at 35.138,1.554 h1.52 r90
Mechanical 1:
  the board outline again, w0.1